# Altium PCB LedPlaneControl.PcbDoc
Units mm, origin at the board's own origin, x right, y up, seen from the top; angles counter-clockwise.
Board outline 261.75 x 24.38 mm, 2 copper layers (Top Layer, Bottom Layer); 91 components, 104 nets, 288 pads, 56 vias.
Unrouted connection lines stored in the file: 61.
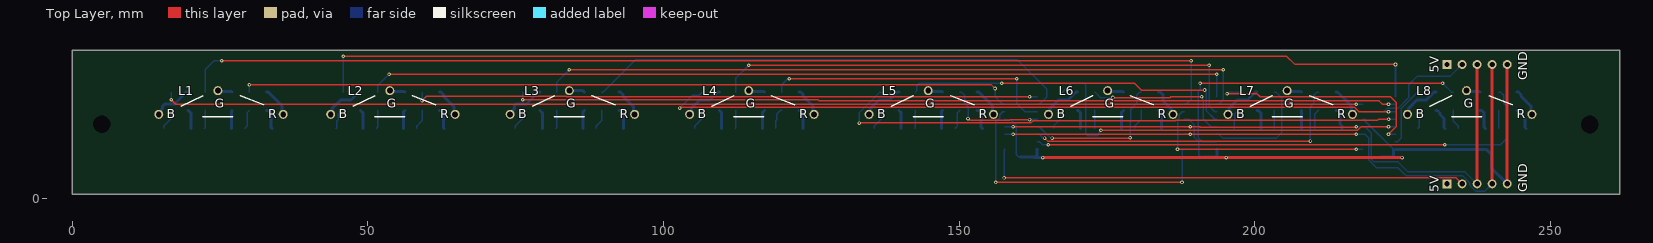
[diagram p0: Top Layer view]
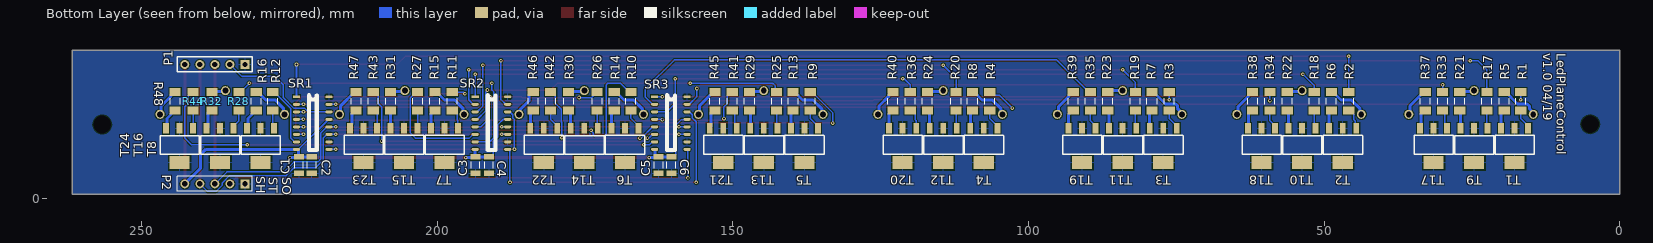
[diagram p1: Bottom Layer view, seen from below]

## Layer stack, top to bottom
Top Solder: solder mask 0.0102, Solder Resist, Dk 3.5
Top Layer: signal copper 0.0356
Dielectric 1: dielectric 0.32, FR-4, Dk 4.8
Bottom Layer: signal copper 0.0356
Bottom Solder: solder mask 0.0102, Solder Resist, Dk 3.5

## Board outline
0,0.635 261.747,0.635 261.747,25.019 0,25.019

## Design rules (kind name [scope] priority, off if disabled: settings)
Clearance [All] p1: gap=0.15 ignorepadtopadclearanceinfootprint=FALSE except(0: Arc-Hole Track-Hole SMDPad-Hole THPad-Hole Via-Hole Fill-Hole Poly-Hole Region-Hole Text-Hole)
DiffPairsRouting [All] p1: maxlimit=0.254 minlimit=0.15 mostfreqgap=0.2 toplayer_minwidth=0.15 toplayer_maxwidth=0.15 toplayer_prefwidth=0.15 bottomlayer_minwidth=0.15 bottomlayer_maxwidth=0.15 bottomlayer_prefwidth=0.15 maxuncoupledlength=12.7
FanoutControl Fanout_SOIC [IsSOIC] p3: bgadir=Out bgaviamode=Centered fanoutstyle=Rows fanoutdirection=InOnly viagrid=0.025 // Fanout_SOIC (Default Rule)
FanoutControl Fanout_Default [All] p5: bgadir=Out bgaviamode=Closest fanoutstyle=Rows fanoutdirection=None viagrid=0.025 // Fanout_Default (Default Rule)
HoleSize [All] p1: absolutevalues=TRUE maxlimit=5.5 minlimit=0.3 maxpercent=80.000 minpercent=20.000
MinimumSolderMaskSliver [All] p1: minsoldermaskwidth=0
PolygonConnect [All] p1: connectstyle=Relief reliefconductorwidth=0.254 reliefentries=4 polygonreliefangle="90 Angle" airgapwidth=0.254
RoutingTopology [OnLayer('Top Layer')] p1: topology=Horizontal
RoutingTopology RoutingTopology_1 [OnLayer('Bottom Layer')] p2: topology=Vertical
RoutingVias [All] p1: holewidth=0.3 width=0.6 viastyle="Through Hole" minholewidth=0.3 minwidth=0.6 maxholewidth=0.8 maxwidth=1.6
SilkToSolderMaskClearance [IsPad] p1: minsilkscreentomaskgap=0.01 clearancetoexposedcopper=TRUE
SolderMaskExpansion [All] p1: expansion=0.076
Width [All] p1: maxlimit=0.508 minlimit=0.15 preferedwidth=0.254
23 further rules are at their usual default settings.

## Components (designator, comment, footprint, x,y, rotation, side; value= is the part's Value field where it differs from the comment)
C1 "CAP 100nF 16V 1206(3216)" CAPC1206(3216)190_L 223.393,5.588 r90 bottom value=1uF
C2 "CAP 100nF 16V 1206(3216)" CAPC1206(3216)190_L 221.234,5.588 r90 bottom value=100nF
C3 "CAP 100nF 16V 1206(3216)" CAPC1206(3216)190_L 193.548,5.588 r90 bottom value=1uF
C4 "CAP 100nF 16V 1206(3216)" CAPC1206(3216)190_L 191.262,5.588 r90 bottom value=100nF
C5 "CAP 100nF 16V 1206(3216)" CAPC1206(3216)190_L 162.56,5.588 r90 bottom value=1uF
C6 "CAP 100nF 16V 1206(3216)" CAPC1206(3216)190_L 160.401,5.588 r90 bottom value=100nF
L1 "RGB_LED_Row" LED_ROW 24.638,18.175 r0 top locked
L2 "RGB_LED_Row" LED_ROW 53.721,18.175 r0 top locked
L3 "RGB_LED_Row" LED_ROW 84.074,18.175 r0 top locked
L4 "RGB_LED_Row" LED_ROW 114.427,18.175 r0 top locked
L5 "RGB_LED_Row" LED_ROW 144.78,18.175 r0 top locked
L6 "RGB_LED_Row" LED_ROW 175.133,18.175 r0 top locked
L7 "RGB_LED_Row" LED_ROW 205.486,18.175 r0 top locked
L8 "RGB_LED_Row" LED_ROW 235.839,18.175 r0 top locked
P1 "Header_5" PinHeader 232.537,22.606 r0 bottom
P2 "Header 5" HDR1X5 232.537,2.413 r0 bottom
R1 "43k 5% 1206(3216)" RESC1206(3216)_M 16.764,16.383 r270 bottom value="2.00 Ohm"
R2 "43k 5% 1206(3216)" RESC1206(3216)_M 45.847,16.383 r270 bottom value="2.00 Ohm"
R3 "43k 5% 1206(3216)" RESC1206(3216)_M 76.2,16.383 r270 bottom value="2.00 Ohm"
R4 "43k 5% 1206(3216)" RESC1206(3216)_M 106.553,16.383 r270 bottom value="2.00 Ohm"
R5 "2R 5% 1206(3216)" RESC1206(3216)_M 19.558,16.383 r270 bottom value="2.00 Ohm"
R6 "2R 5% 1206(3216)" RESC1206(3216)_M 48.768,16.383 r270 bottom value="2.00 Ohm"
R7 "2R 5% 1206(3216)" RESC1206(3216)_M 79.121,16.383 r270 bottom value="2.00 Ohm"
R8 "2R 5% 1206(3216)" RESC1206(3216)_M 109.474,16.383 r270 bottom value="2.00 Ohm"
R9 "43k 5% 1206(3216)" RESC1206(3216)_M 136.906,16.383 r270 bottom value="2.00 Ohm"
R10 "43k 5% 1206(3216)" RESC1206(3216)_M 167.259,16.383 r270 bottom value="2.00 Ohm"
R11 "43k 5% 1206(3216)" RESC1206(3216)_M 197.485,16.383 r270 bottom value="2.00 Ohm"
R12 "43k 5% 1206(3216)" RESC1206(3216)_M 227.838,16.383 r270 bottom value="2.00 Ohm"
R13 "2R 5% 1206(3216)" RESC1206(3216)_M 139.827,16.383 r270 bottom value="2.00 Ohm"
R14 "2R 5% 1206(3216)" RESC1206(3216)_M 170.053,16.383 r270 bottom value="2.00 Ohm"
R15 "2R 5% 1206(3216)" RESC1206(3216)_M 200.406,16.383 r270 bottom value="2.00 Ohm"
R16 "2R 5% 1206(3216)" RESC1206(3216)_M 230.632,16.383 r270 bottom value="2.00 Ohm"
R17 "43k 5% 1206(3216)" RESC1206(3216)_M 22.479,16.383 r270 bottom value="2.00 Ohm"
R18 "43k 5% 1206(3216)" RESC1206(3216)_M 51.689,16.383 r270 bottom value="2.00 Ohm"
R19 "43k 5% 1206(3216)" RESC1206(3216)_M 81.915,16.383 r270 bottom value="2.00 Ohm"
R20 "43k 5% 1206(3216)" RESC1206(3216)_M 112.268,16.383 r270 bottom value="2.00 Ohm"
R21 "2R 5% 1206(3216)" RESC1206(3216)_M 27.051,16.383 r270 bottom value="2.00 Ohm"
R22 "2R 5% 1206(3216)" RESC1206(3216)_M 56.261,16.383 r270 bottom value="2.00 Ohm"
R23 "2R 5% 1206(3216)" RESC1206(3216)_M 86.614,16.383 r270 bottom value="2.00 Ohm"
R24 "2R 5% 1206(3216)" RESC1206(3216)_M 117.094,16.383 r270 bottom value="2.00 Ohm"
R25 "43k 5% 1206(3216)" RESC1206(3216)_M 142.621,16.383 r270 bottom value="2.00 Ohm"
R26 "43k 5% 1206(3216)" RESC1206(3216)_M 172.974,16.383 r270 bottom value="2.00 Ohm"
R27 "43k 5% 1206(3216)" RESC1206(3216)_M 203.327,16.383 r270 bottom value="2.00 Ohm"
R28 "43k 5% 1206(3216)" RESC1206(3216)_M 233.553,16.383 r270 bottom value="2.00 Ohm"
R29 "2R 5% 1206(3216)" RESC1206(3216)_M 147.193,16.383 r270 bottom value="2.00 Ohm"
R30 "2R 5% 1206(3216)" RESC1206(3216)_M 177.8,16.383 r270 bottom value="2.00 Ohm"
R31 "2R 5% 1206(3216)" RESC1206(3216)_M 207.899,16.383 r270 bottom value="2.00 Ohm"
R32 "2R 5% 1206(3216)" RESC1206(3216)_M 238.125,16.383 r270 bottom value="2.00 Ohm"
R33 "43k 5% 1206(3216)" RESC1206(3216)_M 29.972,16.383 r270 bottom value="2.00 Ohm"
R34 "43k 5% 1206(3216)" RESC1206(3216)_M 59.182,16.383 r270 bottom value="2.00 Ohm"
R35 "43k 5% 1206(3216)" RESC1206(3216)_M 89.535,16.383 r270 bottom value="2.00 Ohm"
R36 "43k 5% 1206(3216)" RESC1206(3216)_M 120.015,16.383 r270 bottom value="2.00 Ohm"
R37 "2R 5% 1206(3216)" RESC1206(3216)_M 32.893,16.383 r270 bottom value="2.00 Ohm"
R38 "2R 5% 1206(3216)" RESC1206(3216)_M 62.103,16.383 r270 bottom value="2.00 Ohm"
R39 "2R 5% 1206(3216)" RESC1206(3216)_M 92.456,16.383 r270 bottom value="2.00 Ohm"
R40 "2R 5% 1206(3216)" RESC1206(3216)_M 122.936,16.383 r270 bottom value="2.00 Ohm"
R41 "43k 5% 1206(3216)" RESC1206(3216)_M 150.114,16.383 r270 bottom value="2.00 Ohm"
R42 "43k 5% 1206(3216)" RESC1206(3216)_M 180.848,16.383 r270 bottom value="2.00 Ohm"
R43 "43k 5% 1206(3216)" RESC1206(3216)_M 210.82,16.383 r270 bottom value="2.00 Ohm"
R44 "43k 5% 1206(3216)" RESC1206(3216)_M 241.3,16.383 r270 bottom value="2.00 Ohm"
R45 "2R 5% 1206(3216)" RESC1206(3216)_M 153.035,16.383 r270 bottom value="2.00 Ohm"
R46 "2R 5% 1206(3216)" RESC1206(3216)_M 183.769,16.383 r270 bottom value="2.00 Ohm"
R47 "2R 5% 1206(3216)" RESC1206(3216)_M 213.741,16.383 r270 bottom value="2.00 Ohm"
R48 "2R 5% 1206(3216)" RESC1206(3216)_M 244.348,16.383 r270 bottom value="2.00 Ohm"
SR1 "Blue" SOP16 223.563,17.145 r180 bottom
SR2 "Green" SOP16 193.337,17.145 r180 bottom
SR3 "Red" SOP16 162.984,17.145 r180 bottom
T1 "PNP-Transistor" SOT-223 17.78,9.017 r0 bottom
T2 "PNP-Transistor" SOT-223 46.863,9.017 r0 bottom
T3 "PNP-Transistor" SOT-223 77.216,9.017 r0 bottom
T4 "PNP-Transistor" SOT-223 107.569,9.017 r0 bottom
T5 "PNP-Transistor" SOT-223 137.922,9.017 r0 bottom
T6 "PNP-Transistor" SOT-223 168.275,9.017 r0 bottom
T7 "PNP-Transistor" SOT-223 198.755,9.017 r0 bottom
T8 "PNP-Transistor" SOT-223 229.87,9 r0 bottom
T9 "PNP-Transistor" SOT-223 24.638,9 r0 bottom
T10 "PNP-Transistor" SOT-223 53.721,9 r0 bottom
T11 "PNP-Transistor" SOT-223 84.074,9 r0 bottom
T12 "PNP-Transistor" SOT-223 114.427,9 r0 bottom
T13 "PNP-Transistor" SOT-223 144.78,9 r0 bottom
T14 "PNP-Transistor" SOT-223 175.146,9 r0 bottom
T15 "PNP-Transistor" SOT-223 205.613,9.017 r0 bottom
T16 "PNP-Transistor" SOT-223 236.728,9 r0 bottom
T17 "PNP-Transistor" SOT-223 31.496,9.017 r0 bottom
T18 "PNP-Transistor" SOT-223 60.579,9.017 r0 bottom
T19 "PNP-Transistor" SOT-223 90.932,9.017 r0 bottom
T20 "PNP-Transistor" SOT-223 121.285,9.017 r0 bottom
T21 "PNP-Transistor" SOT-223 151.638,9.017 r0 bottom
T22 "PNP-Transistor" SOT-223 181.991,9.017 r0 bottom
T23 "PNP-Transistor" SOT-223 212.471,9.017 r0 bottom
T24 "PNP-Transistor" SOT-223 243.586,9 r0 bottom

## Footprints (in the part's own frame and the unit in brackets; to place one, negate y for a bottom-side part, rotate by r counter-clockwise, add the part's x,y. Pads: shape width x height; smd on the part's side, far side on the other; paste and mask are expansions set on the pad)
CAPC1206(3216)190_L [mm] "Chip Capacitor, Body 3.2x1.6mm, Height 1.9mm, IPC High Density"
  rect 0.95x1.7 smd: 1(-1.4,0) 2(1.4,0)
  silkscreen extent -0.55,-0.75 0.55,0.75, body extent -1.7,-0.9 1.7,0.9, height 1.9
HDR1X5 [mm] "Connector; Header; 5 Position"
  rect 1.5x1.5 hole 0.9: 1(0,0)
  round 1.5 hole 0.9: 2(2.54,0) 3(5.08,0) 4(7.62,0) 5(10.16,0)
  silkscreen extent -1.27,-1.27 11.43,1.27
LED_ROW [mil]
  round 60 hole 39.37: 1(435,-157.48) 2(0,0) 3(-393.7,-157.48)
  silkscreen extent -245,-175 305,-35
PinHeader [mm] "Reichelt: RND 205-00675"
  rect 1.5x1.5 hole 0.9: 1(0,0)
  round 1.5 hole 0.9: 2(2.54,0) 3(5.08,0) 4(7.62,0) 5(10.16,0)
  silkscreen extent -1.27,-1.27 11.43,1.27, body extent -1.35,-3.18 11.51,3.22, height 11.5
RESC1206(3216)_M [mm] "Chip Resistor, Body 3.2x1.6mm, IPC Low Density"
  rect 1.35x1.9 smd: 1(-1.55,0) 2(1.55,0)
  silkscreen extent -0.5,-0.85 0.5,0.85, body extent -1.67,-0.87 1.67,0.87, height 0.75
SOP16 [mm]
  rect 1.2x0.5 smd: 1(-0.25,0)
  oval 1.2x0.5 smd: 2(-0.25,-1.27) 3(-0.25,-2.54) 4(-0.25,-3.81) 5(-0.25,-5.08) 6(-0.25,-6.35) 7(-0.25,-7.62) 8(-0.25,-8.89) 9(5.25,-8.89) 10(5.25,-7.62) 11(5.25,-6.35) 12(5.25,-5.08) 13(5.25,-3.81) 14(5.25,-2.54) 15(5.25,-1.27) 16(5.25,0)
  silkscreen extent 1.86,-9.02 3.19,0.25, body extent -3.43,-9.39 5.56,0.51, height 1.48
SOT-223 [mm] "BCP 51-16 NXP"
  rect 1x1.8 smd: 1(-2.286,-2.794) 2(0,-2.794) 3(2.286,-2.794)
  rect 3.4x2.2 smd: 2(0,2.984)
  silkscreen extent -3.35,-1.59 3.3,1.59, body extent -3.3,-3.32 3.2,3.57, height 1.7

## Part data
C1 C2 C3 C4 C5 C6: library part CMP-1037-04176-1, "CAP 100nF 16V ±1% 1206 (3216 Metric) Thickness 1.9mm SMD", Case-EIA=1206, Case-Metric=3216, Rated Voltage="16 V", Tolerance=±1%, Max Thickness="1.9 mm", Technology=SMT
P2: "Header, 5-Pin", LatestRevisionDate=17-Jul-2002, LatestRevisionNote="Re-released for DXP Platform.", Publisher="Altium Limited"
R1 R2 R3 R4 R9 R10 R11 R12 R17 R18 R19 R20 R25 R26 R27 R28 R33 R34 R35 R36 R41 R42 R43 R44: library part CMP-1014-00009-1, "43k 0.25W 5% 1206 (3216 Metric)  SMD", Case-EIA=1206, Case-Metric=3216, Power="0.25 W", Tolerance="5 %", Technology=SMT
R5 R6 R7 R8 R13 R14 R15 R16 R21 R22 R23 R24 R29 R30 R31 R32 R37 R38 R39 R40 R45 R46 R47 R48: library part CMP-1014-00009-1, "2R 0.25W 5% 1206 (3216 Metric)  SMD", Case-EIA=1206, Case-Metric=3216, Power="0.25 W", Tolerance="5 %", Technology=SMT
SR1 SR2 SR3: library part 74HC595, "74HC595 Farnell:  2098004"
T1 T2 T3 T4 T5 T6 T7 T8 T9 T10 T11 T12 T13 T14 T15 T16 T17 T18 T19 T20 T21 T22 T23 T24: "Reichelt: BCP 51-16 NXP"

## Free pads (board coordinates)
  round 1.524 hole 3: 1(5,12.5) 1(256.667,12.446)

## Via types
v1: diameter 0.6, hole 0.3, Top Layer to Bottom Layer, 56 vias

## Nets (pads, with @x,y where several pads share a name; then routed paths per layer and width w, separated by ;. In a path a pad name is that pad's centre, name@x,y a point inside that pad or via, vN(x,y) a via of type N, cw(c..) or ccw(c..) an arc to the next point about the centre after c; other vN are vias at no path point)
5V: C1.1 C2.1 C3.1 C4.1 C5.1 C6.1 P1.1 P2.1 SR1.10 SR1.16 SR2.10 SR2.16 SR3.10 SR3.16 T1.2 T2.2 T3.2 T4.2 T5.2 T6.2 T7.2 T8.2 T9.2 T10.2 T11.2 T12.2 T13.2 T14.2 T15.2 T16.2 T17.2 T18.2 T19.2 T20.2 T21.2 T22.2 T23.2 T24.2
B_0: L1.3 R5.1 | length 6.9
  Bottom Layer w0.508: L1.3 14.638,14.45 15.287,15.099 15.287,15.553 15.668,15.933 17.283,15.933 19.283,17.933 R5.1
B_1: L2.3 R6.1 | length 7
  Bottom Layer w0.508: L2.3 43.915,14.369 43.915,15.098 45.411,16.594 47.154,16.594 48.493,17.933 R6.1
B_2: L3.3 R7.1 | length 7
  Bottom Layer w0.508: L3.3 74.074,14.45 74.846,15.222 74.846,15.675 75.104,15.933 76.846,15.933 78.846,17.933 R7.1
B_3: L4.3 R8.1 | length 7
  Bottom Layer w0.508: L4.3 104.621,14.369 104.621,15.098 106.117,16.594 107.86,16.594 109.199,17.933 R8.1
B_4: L5.3 R13.1 | length 7
  Bottom Layer w0.508: L5.3 134.974,14.369 134.974,15.098 136.47,16.594 138.213,16.594 139.552,17.933 R13.1
B_5: L6.3 R14.1 | length 6.9
  Bottom Layer w0.508: L6.3 165.327,14.369 165.327,15.098 166.823,16.594 168.439,16.594 169.778,17.933 R14.1
B_6: L7.3 R15.1 | length 7
  Bottom Layer w0.508: L7.3 195.68,14.369 195.68,15.225 197.049,16.594 198.792,16.594 200.131,17.933 R15.1
B_7: L8.3 R16.1 | length 6.9
  Bottom Layer w0.508: L8.3 226.033,14.369 226.033,15.225 227.402,16.594 229.018,16.594 230.357,17.933 R16.1
B_Q0: R1.1 SR1.15 | length 203.2
  Top Layer w0.254: v1(16.764,16.637) 17.526,15.875 v1(217.17,15.875)
  Bottom Layer w0.254: v1(16.764,16.637) R1.1 ; v1(217.17,15.875) SR1.15
B_Q1: R2.1 SR1.1 | length 190.1
  Top Layer w0.254: v1(45.847,24.003) 205.395,24.003 206.792,22.606 v1(223.813,22.606)
  Bottom Layer w0.254: R2.1 v1(45.847,24.003) ; SR1.1 v1(223.813,22.606)
B_Q2: R3.1 SR1.2 | length 149.2
  Top Layer w0.254: v1(76.2,16.637) 126.116,16.637 126.312,16.441 176.261,16.441 176.272,16.452 221.038,16.452 221.615,15.875 v1(222.631,15.875)
  Bottom Layer w0.254: v1(76.2,16.637) R3.1 ; v1(222.631,15.875) SR1.2
B_Q3: R4.1 SR1.3 | length 126.4
  Top Layer w0.254: v1(102.743,15.24) 102.743,15.367 216.862,15.367 217.624,14.605 v1(222.631,14.605)
  Bottom Layer w0.254: v1(102.743,15.24) 104.888,17.385 106.005,17.385 R4.1 ; v1(222.631,14.605) SR1.3
B_Q4: R9.1 SR1.4 | length 98.1
  Top Layer w0.254: v1@132.969,12.573 v1(133.096,12.7) ; v1@133.179,12.71 162.164,12.71 162.535,13.081 186.557,13.081 186.626,13.15 195.042,13.15 195.056,13.136 220.781,13.136 220.98,13.335 v1(222.634,13.335)
  Bottom Layer w0.254: v1(133.096,12.7) 133.096,14.398 136.631,17.933 R9.1 ; v1(222.634,13.335) SR1.4
B_Q5: R10.1 SR1.5 | length 66.6
  Top Layer w0.254: v1(173.99,11.488) 217.409,11.488 217.986,12.065 v1(222.631,12.065)
  Bottom Layer w0.254: R10.1 167.534,17.933 169.032,19.431 171.174,19.431 171.45,19.155 171.45,10.795 171.704,10.541 173.399,10.541 173.637,10.779 173.637,11.041 173.99,11.394 v1(173.99,11.488) ; v1(222.631,12.065) SR1.5
B_Q6: R11.1 SR1.6 | length 38.6
  Top Layer w0.254: v1(195.326,17.653) 200.409,17.653 200.926,17.136 220.209,17.136 220.218,17.145 222.99,17.145 223.901,16.234 223.901,12.065 v1(222.631,10.795)
  Bottom Layer w0.254: v1(195.326,17.653) 195.606,17.933 R11.1 ; v1(222.631,10.795) SR1.6
B_Q7: R12.1 SR1.7 | length 10.4
  Bottom Layer w0.254: SR1.7 224.163,9.525 224.8,10.162 224.8,15.17 227.563,17.933 R12.1
G_0: L1.2 R21.1 | length 2.5
  Bottom Layer w0.508: L1.2 24.759,18.054 26.93,18.054 R21.1
G_1: L2.2 R22.1 | length 2.6
  Bottom Layer w0.508: L2.2 53.842,18.054 56.14,18.054 R22.1
G_2: L3.2 R23.1 | length 2.6
  Bottom Layer w0.508: L3.2 86.346,18.175 86.588,17.933 R23.1
G_3: L4.2 R24.1 | length 2.8
  Bottom Layer w0.508: L4.2 114.548,18.054 116.973,18.054 R24.1
G_4: L5.2 R29.1 | length 2.5
  Bottom Layer w0.508: L5.2 144.901,18.054 147.072,18.054 R29.1
G_5: L6.2 R30.1 | length 2.8
  Bottom Layer w0.508: L6.2 175.254,18.054 177.679,18.054 R30.1
G_6: L7.2 R31.1 | length 2.5
  Bottom Layer w0.508: L7.2 205.607,18.054 207.778,18.054 R31.1
G_7: L8.2 R32.1 | length 2.4
  Bottom Layer w0.508: L8.2 235.96,18.054 238.004,18.054 R32.1
G_Q0: R17.1 SR2.15 | length 179.2
  Top Layer w0.254: v1(25.273,23.241) v1(189.23,23.241)
  Bottom Layer w0.254: R17.1 22.479,21.717 24.003,23.241 v1(25.273,23.241) ; SR2.15 188.437,15.875 189.23,16.668 v1(189.23,23.241)
G_Q1: R18.1 SR2.1 | length 147.6
  Top Layer w0.254: v1(53.594,20.955) 53.848,20.955 v1(193.576,20.955)
  Bottom Layer w0.254: R18.1 51.689,19.05 v1(53.594,20.955) ; v1(193.576,20.955) 193.576,20.856 193.548,20.828 193.587,20.789 SR2.1
G_Q2: R19.1 SR2.2 | length 121.8
  Top Layer w0.254: v1(84.074,21.717) v1(194.691,21.717)
  Bottom Layer w0.254: R19.1 81.915,19.558 v1(84.074,21.717) ; SR2.2 193.937,15.875 194.691,16.629 v1(194.691,21.717)
G_Q3: R20.1 SR2.3 | length 91.9
  Top Layer w0.254: v1(114.427,22.479) v1(192.278,22.479)
  Bottom Layer w0.254: R20.1 112.268,20.32 v1(114.427,22.479) ; v1(192.278,22.479) 192.278,15.564 193.237,14.605 SR2.3
G_Q4: R25.1 SR2.4 | length 56.5
  Top Layer w0.254: v1(157.226,19.431) 179.658,19.431 180.801,18.288 v1(191.516,18.288)
  Bottom Layer w0.254: R25.1 142.875,18.187 142.875,19.05 143.256,19.431 v1(157.226,19.431) ; v1(191.516,18.288) 191.77,18.034 191.77,14.802 193.237,13.335 SR2.4
G_Q5: R26.1 SR2.5 | length 25.2
  Top Layer w0.254: v1(176.022,17.018) 185.674,17.018 185.801,17.145 v1(191.008,17.145)
  Bottom Layer w0.254: R26.1 173.889,17.018 v1(176.022,17.018) ; v1(191.008,17.145) 191.008,16.953 191.262,16.699 191.262,13.42 192.606,12.076 193.576,12.076 SR2.5
G_Q6: R27.1 SR2.6 | length 19.2
  Bottom Layer w0.254: SR2.6 193.937,10.795 194.572,10.16 203.686,10.16 204.554,11.028 204.554,16.981 203.602,17.933 R27.1
G_Q7: R28.1 SR2.7 | length 56.2
  Top Layer w0.254: v1(190.754,19.431) v1(231.775,19.431)
  Bottom Layer w0.254: v1(190.754,19.431) 190.754,18.283 190.431,17.96 190.431,10.229 191.135,9.525 SR2.7 ; v1(231.775,19.431) 231.78,19.431 233.278,17.933 R28.1
GND: C1.2 C2.2 C3.2 C4.2 C5.2 C6.2 P1.5 P2.5 SR1.8 SR1.13 SR2.8 SR2.13 SR3.8 SR3.13 | length 143.9
  Top Layer w0.508: v1@164.211,6.858 v1(195.199,6.858) v1(224.917,6.858) ; P2.5 P1.5
  Bottom Layer w0.254: SR3.13 157.772,13.297 158.715,13.297 159.708,12.304 159.708,7.336 160.056,6.988 C6.2 ; SR2.13 188.849,13.335 189.738,12.446 189.738,10.351 190.539,9.55 190.539,7.336 190.887,6.988 C4.2 ; SR1.13 218.596,13.335 218.71,13.221 218.71,13.008 SR1.8@223.463,8.255
  Bottom Layer w0.508: C6.2 C5.2 ; SR3.8 163.16,8.255 163.156,8.251 163.156,7.209 162.935,6.988 C5.2 ; v1(164.153,6.858) 162.69,6.858 C5.2 ; C4.2 C3.2 ; SR2.8 193.587,7.027 C3.2 ; v1(195.199,6.858) 195.181,6.876 193.66,6.876 C3.2 ; C2.2 C1.2@222.846,6.988 ; SR1.8@223.463,8.255 223.463,7.058 C1.2 C1.2@222.846,6.988 ; SR1.8 239.141,8.255 240.03,7.366 240.03,5.08 P2.5 ; v1(224.917,6.858) 222.976,6.858 C1.2@222.846,6.988
NetR1_2: R1.2 T1.1 | length 3.5
  Bottom Layer w0.254: T1.1 15.494,12.211 16.764,13.481 R1.2
NetR2_2: R2.2 T2.1 | length 3.8
  Bottom Layer w0.254: T2.1 44.76,11.811 44.76,13.092 45.024,13.356 45.024,14.285 45.572,14.833 R2.2
NetR3_2: R3.2 T3.1 | length 3.5
  Bottom Layer w0.254: T3.1 74.93,12.211 76.2,13.481 R3.2
NetR4_2: R4.2 T4.1 | length 3.5
  Bottom Layer w0.254: T4.1 105.283,12.211 106.553,13.481 R4.2
NetR5_2: R5.2 T1.3 | length 3.3
  Bottom Layer w0.508: R5.2 19.645,14.833 20.066,14.412 T1.3
NetR6_2: R6.2 T2.3 | length 3.2
  Bottom Layer w0.508: R6.2 49.149,14.452 T2.3
NetR7_2: R7.2 T3.3 | length 3.2
  Bottom Layer w0.508: R7.2 79.502,14.452 T3.3
NetR8_2: R8.2 T4.3 | length 3.2
  Bottom Layer w0.508: R8.2 109.855,14.452 T4.3
NetR9_2: R9.2 T5.1 | length 3.5
  Bottom Layer w0.254: T5.1 135.636,12.211 136.906,13.481 R9.2
NetR10_2: R10.2 T6.1 | length 3.5
  Bottom Layer w0.254: T6.1 165.989,12.211 167.259,13.481 R10.2
NetR11_2: R11.2 T7.1 | length 3.6
  Bottom Layer w0.254: T7.1 196.525,11.811 196.525,13.092 196.662,13.229 196.662,14.285 197.21,14.833 R11.2
NetR12_2: R12.2 T8.1 | length 3.1
  Bottom Layer w0.254: T8.1 227.838,12.048 R12.2
NetR13_2: R13.2 T5.3 | length 3.2
  Bottom Layer w0.508: R13.2 140.208,14.452 T5.3
NetR14_2: R14.2 T6.3 | length 3.3
  Bottom Layer w0.508: R14.2 170.14,14.833 170.561,14.412 T6.3
NetR15_2: R15.2 T7.3 | length 3.4
  Bottom Layer w0.508: R15.2 200.62,14.833 201.041,14.412 T7.3
NetR16_2: R16.2 T8.3 | length 3.8
  Bottom Layer w0.508: R16.2 230.907,14.833 231.328,14.412 231.328,14.137 232.009,13.456 232.009,11.941 T8.3
NetR17_2: R17.2 T9.1 | length 3.1
  Bottom Layer w0.254: T9.1 22.479,11.921 R17.2
NetR18_2: R18.2 T10.1 | length 3.1
  Bottom Layer w0.254: T10.1 51.689,12.048 R18.2
NetR19_2: R19.2 T11.1 | length 3.1
  Bottom Layer w0.254: T11.1 81.915,11.921 R19.2
NetR20_2: R20.2 T12.1 | length 3.1
  Bottom Layer w0.254: T12.1 112.268,11.921 R20.2
NetR21_2: R21.2 T9.3 | length 3.1
  Bottom Layer w0.508: T9.3 26.924,14.706 R21.2
NetR22_2: R22.2 T10.3 | length 3.1
  Bottom Layer w0.508: T10.3 56.007,14.579 R22.2
NetR23_2: R23.2 T11.3 | length 3.1
  Bottom Layer w0.508: T11.3 86.36,14.579 R23.2
NetR24_2: R24.2 T12.3 | length 3.2
  Bottom Layer w0.508: T12.3 116.713,14.452 R24.2
NetR25_2: R25.2 T13.1 | length 3.1
  Bottom Layer w0.254: T13.1 142.621,11.921 R25.2
NetR26_2: R26.2 T14.1 | length 3.1
  Bottom Layer w0.254: T14.1 172.974,11.908 R26.2
NetR27_2: R27.2 T15.1 | length 3
  Bottom Layer w0.254: T15.1 R27.2
NetR28_2: R28.2 T16.1 | length 3.4
  Bottom Layer w0.254: R28.2 233.553,13.083 234.442,12.194 T16.1
NetR29_2: R29.2 T13.3 | length 3.1
  Bottom Layer w0.508: T13.3 147.066,14.706 R29.2
NetR30_2: R30.2 T14.3 | length 3.2
  Bottom Layer w0.508: T14.3 177.432,14.465 R30.2
NetR31_2: R31.2 T15.3 | length 3
  Bottom Layer w0.508: T15.3 R31.2
NetR32_2: R32.2 T16.3 | length 3.6
  Bottom Layer w0.508: R32.2 238.4,14.833 238.821,14.412 238.821,11.987 T16.3
NetR33_2: R33.2 T17.1 | length 3.3
  Bottom Layer w0.254: T17.1 29.583,12.184 29.583,14.444 R33.2
NetR34_2: R34.2 T18.1 | length 3.4
  Bottom Layer w0.254: T18.1 58.293,12.211 59.182,13.1 R34.2
NetR35_2: R35.2 T19.1 | length 3.4
  Bottom Layer w0.254: T19.1 88.646,12.211 89.535,13.1 R35.2
NetR36_2: R36.2 T20.1 | length 3.6
  Bottom Layer w0.254: T20.1 118.999,13.092 119.192,13.285 119.192,14.285 119.74,14.833 R36.2
NetR37_2: R37.2 T17.3 | length 3.6
  Bottom Layer w0.508: R37.2 33.168,14.833 33.589,14.412 33.589,12.004 T17.3
NetR38_2: R38.2 T18.3 | length 3.5
  Bottom Layer w0.508: R38.2 62.378,14.833 62.799,14.412 62.799,11.877 T18.3
NetR39_2: R39.2 T19.3 | length 3.5
  Bottom Layer w0.508: R39.2 92.731,14.833 93.152,14.412 93.152,14.137 93.218,14.071 T19.3
NetR40_2: R40.2 T20.3 | length 3.4
  Bottom Layer w0.508: R40.2 123.15,14.833 123.571,14.412 T20.3
NetR41_2: R41.2 T21.1 | length 3.3
  Bottom Layer w0.254: T21.1 149.725,12.184 149.725,14.444 R41.2
NetR42_2: R42.2 T22.1 | length 3.5
  Bottom Layer w0.254: T22.1 179.705,12.211 180.848,13.354 R42.2
NetR43_2: R43.2 T23.1 | length 3.3
  Bottom Layer w0.254: T23.1 210.185,14.285 210.733,14.833 R43.2
NetR44_2: R44.2 T24.1 | length 3
  Bottom Layer w0.254: T24.1 R44.2
NetR45_2: R45.2 T21.3 | length 3.6
  Bottom Layer w0.508: R45.2 153.31,14.833 153.731,14.412 153.731,12.004 T21.3
NetR46_2: R46.2 T22.3 | length 3.3
  Bottom Layer w0.508: R46.2 183.856,14.833 184.277,14.412 T22.3
NetR47_2: R47.2 T23.3 | length 3.6
  Bottom Layer w0.508: R47.2 214.016,14.833 214.437,14.412 214.437,12.531 214.757,12.211 T23.3
NetR48_2: R48.2 T24.3 | length 3.8
  Bottom Layer w0.508: R48.2 244.623,14.833 245.044,14.412 245.044,14.137 245.725,13.456 245.725,11.941 T24.3
NetSR1_9: SR1.9 SR2.14 | length 38.4
  Top Layer w0.254: v1(186.944,8.255) v1(217.17,8.255)
  Bottom Layer w0.254: v1(186.944,8.255) 186.944,13.287 187.221,13.564 187.221,14.089 187.737,14.605 SR2.14 ; v1(217.17,8.255) SR1.9
NetSR2_9: SR2.9 SR3.14 | length 50.2
  Top Layer w0.254: v1(156.21,2.667) v1(187.706,2.667)
  Bottom Layer w0.254: v1(156.21,2.667) 156.21,12.906 156.868,13.564 156.868,14.089 157.384,14.605 SR3.14 ; v1@187.706,2.794 v1(187.706,2.667) 187.706,8.014 187.947,8.255 SR2.9
R_0: L1.1 R37.1 | length 5.1
  Bottom Layer w0.508: R37.1 33.168,17.933 35.493,15.608 35.493,14.369 L1.1
R_1: L2.1 R38.1 | length 5
  Bottom Layer w0.508: R38.1 62.378,17.933 62.799,17.512 62.799,17.237 64.576,15.46 64.576,14.369 L2.1
R_2: L3.1 R39.1 | length 5
  Bottom Layer w0.508: R39.1 92.731,17.933 93.152,17.512 93.152,17.237 94.929,15.46 94.929,14.369 L3.1
R_3: L4.1 R40.1 | length 5
  Bottom Layer w0.508: R40.1 123.211,17.933 123.632,17.512 123.632,17.237 125.282,15.587 125.282,14.369 L4.1
R_4: L5.1 R45.1 | length 5.1
  Bottom Layer w0.508: R45.1 153.31,17.933 155.635,15.608 155.635,14.369 L5.1
R_5: L6.1 R46.1 | length 4.9
  Bottom Layer w0.508: R46.1 184.044,17.933 184.465,17.512 184.465,16.496 185.988,14.973 185.988,14.369 L6.1
R_6: L7.1 R47.1 | length 5.1
  Bottom Layer w0.508: R47.1 214.016,17.933 216.341,15.608 216.341,14.369 L7.1
R_7: L8.1 R48.1 | length 5
  Bottom Layer w0.508: R48.1 244.623,17.933 245.044,17.512 245.044,17.237 246.694,15.587 246.694,14.369 L8.1
R_Q0: R33.1 SR3.15 | length 131.2
  Top Layer w0.254: v1(29.972,19.177) 30.009,19.214 155.411,19.214 v1(156.083,18.542)
  Bottom Layer w0.254: R33.1 v1(29.972,19.177) ; v1(156.083,18.542) 156.083,17.176 157.384,15.875 SR3.15
R_Q1: R34.1 SR3.1 | length 105.8
  Top Layer w0.254: v1(59.182,16.51) 59.886,17.214 83.566,17.214 83.644,17.136 161.916,17.136 v1(161.925,17.145)
  Bottom Layer w0.254: v1(59.182,16.51) R34.1 ; v1(161.925,17.145) SR3.1
R_Q2: R35.1 SR3.2 | length 83
  Bottom Layer w0.254: R35.1 89.81,17.933 95.245,23.368 159.893,23.368 164.846,18.415 164.846,17.137 163.584,15.875 SR3.2
R_Q3: R36.1 SR3.3 | length 49.7
  Top Layer w0.254: v1(121.285,20.193) v1(159.766,20.193)
  Bottom Layer w0.254: R36.1 120.015,19.177 121.031,20.193 v1(121.285,20.193) ; v1(159.766,20.193) 159.766,15.987 161.148,14.605 SR3.3
R_Q4: R41.1 SR3.4 | length 17.2
  Top Layer w0.254: v1(151.511,13.462) 151.837,13.136 158.539,13.136 158.691,13.287 v1(161.925,13.287)
  Bottom Layer w0.254: R41.1 150.389,17.933 150.937,17.385 150.937,16.027 151.511,15.453 v1(151.511,13.462) ; v1(161.925,13.287) 161.973,13.335 SR3.4
R_Q5: R42.1 SR3.5 | length 25
  Top Layer w0.254: v1(165.735,10.16) 178.862,10.16 v1(178.928,10.226)
  Bottom Layer w0.254: SR3.5 163.576,12.065 165.481,10.16 v1(165.735,10.16) ; v1@178.928,10.421 178.928,12.826 179.027,12.925 179.027,15.029 180.025,16.027 180.025,17.385 180.573,17.933 R42.1
R_Q6: R43.1 SR3.6 | length 55.8
  Top Layer w0.254: v1(164.465,10.16) 165.031,9.594 165.485,9.594 165.496,9.583 209.26,9.583 209.329,9.652 v1(209.423,9.652)
  Bottom Layer w0.254: SR3.6 163.584,10.795 164.153,10.226 164.399,10.226 v1(164.465,10.16) ; v1(209.423,9.652) 209.408,9.667 209.408,15.438 209.997,16.027 209.997,17.385 210.545,17.933 R43.1
R_Q7: R44.1 SR3.7 | length 88.7
  Top Layer w0.254: v1(165.1,9.017) v1(232.156,9.017)
  Bottom Layer w0.254: SR3.7 163.593,9.525 164.101,9.017 v1(165.1,9.017) ; v1(232.156,9.017) 241.562,9.017 242.697,10.152 242.697,15.453 242.123,16.027 242.123,17.385 241.575,17.933 R44.1
SerialIn: P1.2 SR1.14 | length 21.3
  Bottom Layer w0.254: SR1.14 221.815,14.605 222.392,15.182 224.215,15.182 226.06,17.027 226.06,19.177 227.526,20.643 233.114,20.643 P1.2
SerialOut: P2.2 SR3.9 | length 82.8
  Top Layer w0.254: v1(157.607,3.429) 157.618,3.44 234.05,3.44 P2.2
  Bottom Layer w0.254: v1(157.607,3.429) 157.607,8.128 SR3.9
SHCP: P1.4 P2.4 SR1.11 SR2.11 SR3.11 | length 110.6
  Top Layer w0.254: v1(159.131,10.795) 159.139,10.803 189.095,10.803 v1(189.103,10.795) v1(217.17,10.795)
  Top Layer w0.508: P2.4 P1.4
  Bottom Layer w0.254: SR3.11 v1(159.131,10.795) ; SR2.11 v1(189.103,10.795) ; v1(217.17,10.795) SR1.11 218.663,10.795 219.306,10.152 219.306,6.437 220.619,5.123 224.239,5.123 225.552,3.81 235.132,3.81 236.347,2.595 236.347,2.231 237.435,1.143 238.887,1.143 P2.4
STP: P1.3 P2.3 SR1.12 SR2.12 SR3.12 | length 107.7
  Top Layer w0.254: v1(159.131,12.065) 190.695,12.065 190.764,11.996 217.007,11.996 217.076,12.065 v1(217.17,12.065)
  Top Layer w0.508: P2.3 P1.3
  Bottom Layer w0.254: SR3.12 v1(159.131,12.065) ; SR2.12 v1(189.103,12.065) ; v1(217.17,12.065) SR1.12 218.672,12.065 219.71,11.027 219.71,6.604 220.195,6.119 224.259,6.119 225.933,4.445 235.585,4.445 P2.3

## Polygon pours and split planes (outlines as drawn)
5V on Bottom Layer "5V Bottom Polygon" (solid, pour order 2): 0,0.762 0,24.892 261.747,24.892 261.747,0.635

## Other copper
Top Layer:
  region: 246.888,14.175
Bottom Layer:
  region: 227.584,11.794

## Silkscreen, mask and mechanical layers (free items; w line width, h text height)
Top Overlay:
  text "5V" at 231.14,21.209 h1.52 r90
  text "GND" at 246.126,19.939 h1.52 r90
  text "5V" at 231.14,1 h1.52 r90
  text "GND" at 246.126,1 h1.52 r90
Bottom Overlay:
  text "LedPlaneControl  / v1.0 04/19" at 12.954,24.511 h1.52 r90
  text "SH" at 230.632,3.683 h1.52 r90
  text "SO" at 226.187,3.556 h1.52 r90
  text "ST" at 228.473,3.556 h1.52 r90
Mechanical 1:
  the board outline again, w0.254

## Text inside footprints (layer, text, board x,y; h text height)
L1: Top Overlay "R" at 33.147,13.476 h1.52; Top Overlay "G" at 24.13,15.254 h1.52; Top Overlay "B" at 16.002,13.476 h1.52
L2: Top Overlay "B" at 45.085,13.476 h1.52; Top Overlay "G" at 53.213,15.254 h1.52; Top Overlay "R" at 62.23,13.476 h1.52
L3: Top Overlay "R" at 92.583,13.476 h1.52; Top Overlay "G" at 83.566,15.254 h1.52; Top Overlay "B" at 75.438,13.476 h1.52
L4: Top Overlay "B" at 105.791,13.476 h1.52; Top Overlay "G" at 113.919,15.254 h1.52; Top Overlay "R" at 122.936,13.476 h1.52
L5: Top Overlay "R" at 153.289,13.476 h1.52; Top Overlay "G" at 144.272,15.254 h1.52; Top Overlay "B" at 136.144,13.476 h1.52
L6: Top Overlay "B" at 166.497,13.476 h1.52; Top Overlay "G" at 174.625,15.254 h1.52; Top Overlay "R" at 183.642,13.476 h1.52
L7: Top Overlay "R" at 213.995,13.476 h1.52; Top Overlay "G" at 204.978,15.254 h1.52; Top Overlay "B" at 196.85,13.476 h1.52
L8: Top Overlay "B" at 227.203,13.476 h1.52; Top Overlay "G" at 235.331,15.254 h1.52; Top Overlay "R" at 244.348,13.476 h1.52